# Altium PCB 风火轮（单面）.PcbDoc (part 1 of 4)
Units mil, origin at the board's own origin, x right, y up, seen from the top; angles counter-clockwise.
Board outline 3937.01 x 3937.01 mil, 2 copper layers (Top Layer, Bottom Layer); 108 components, 81 nets, 448 pads, 132 vias.
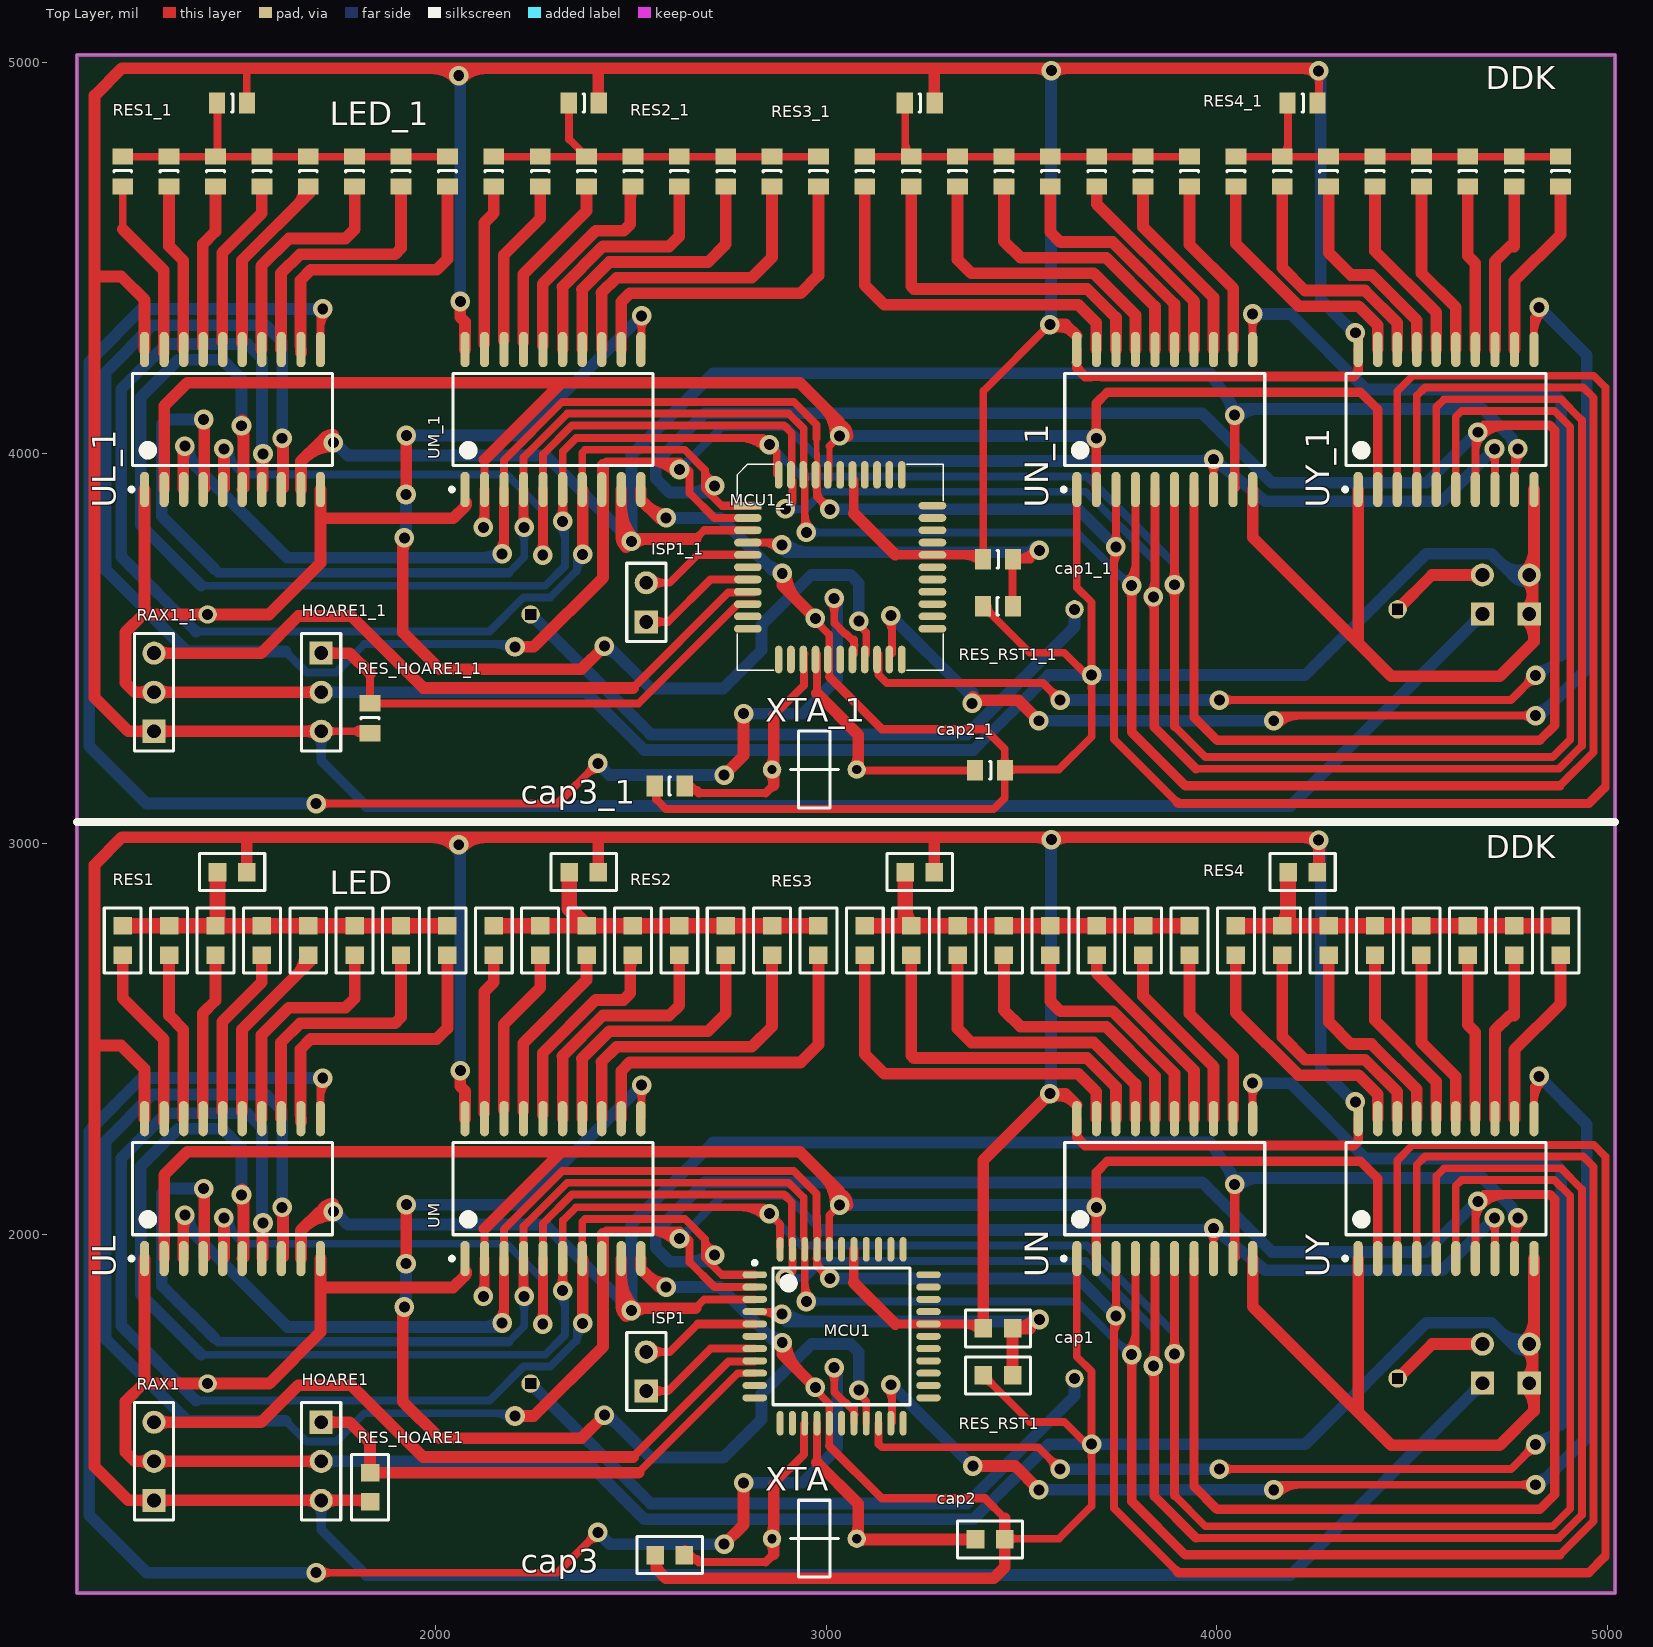
[diagram p0: Top Layer view]
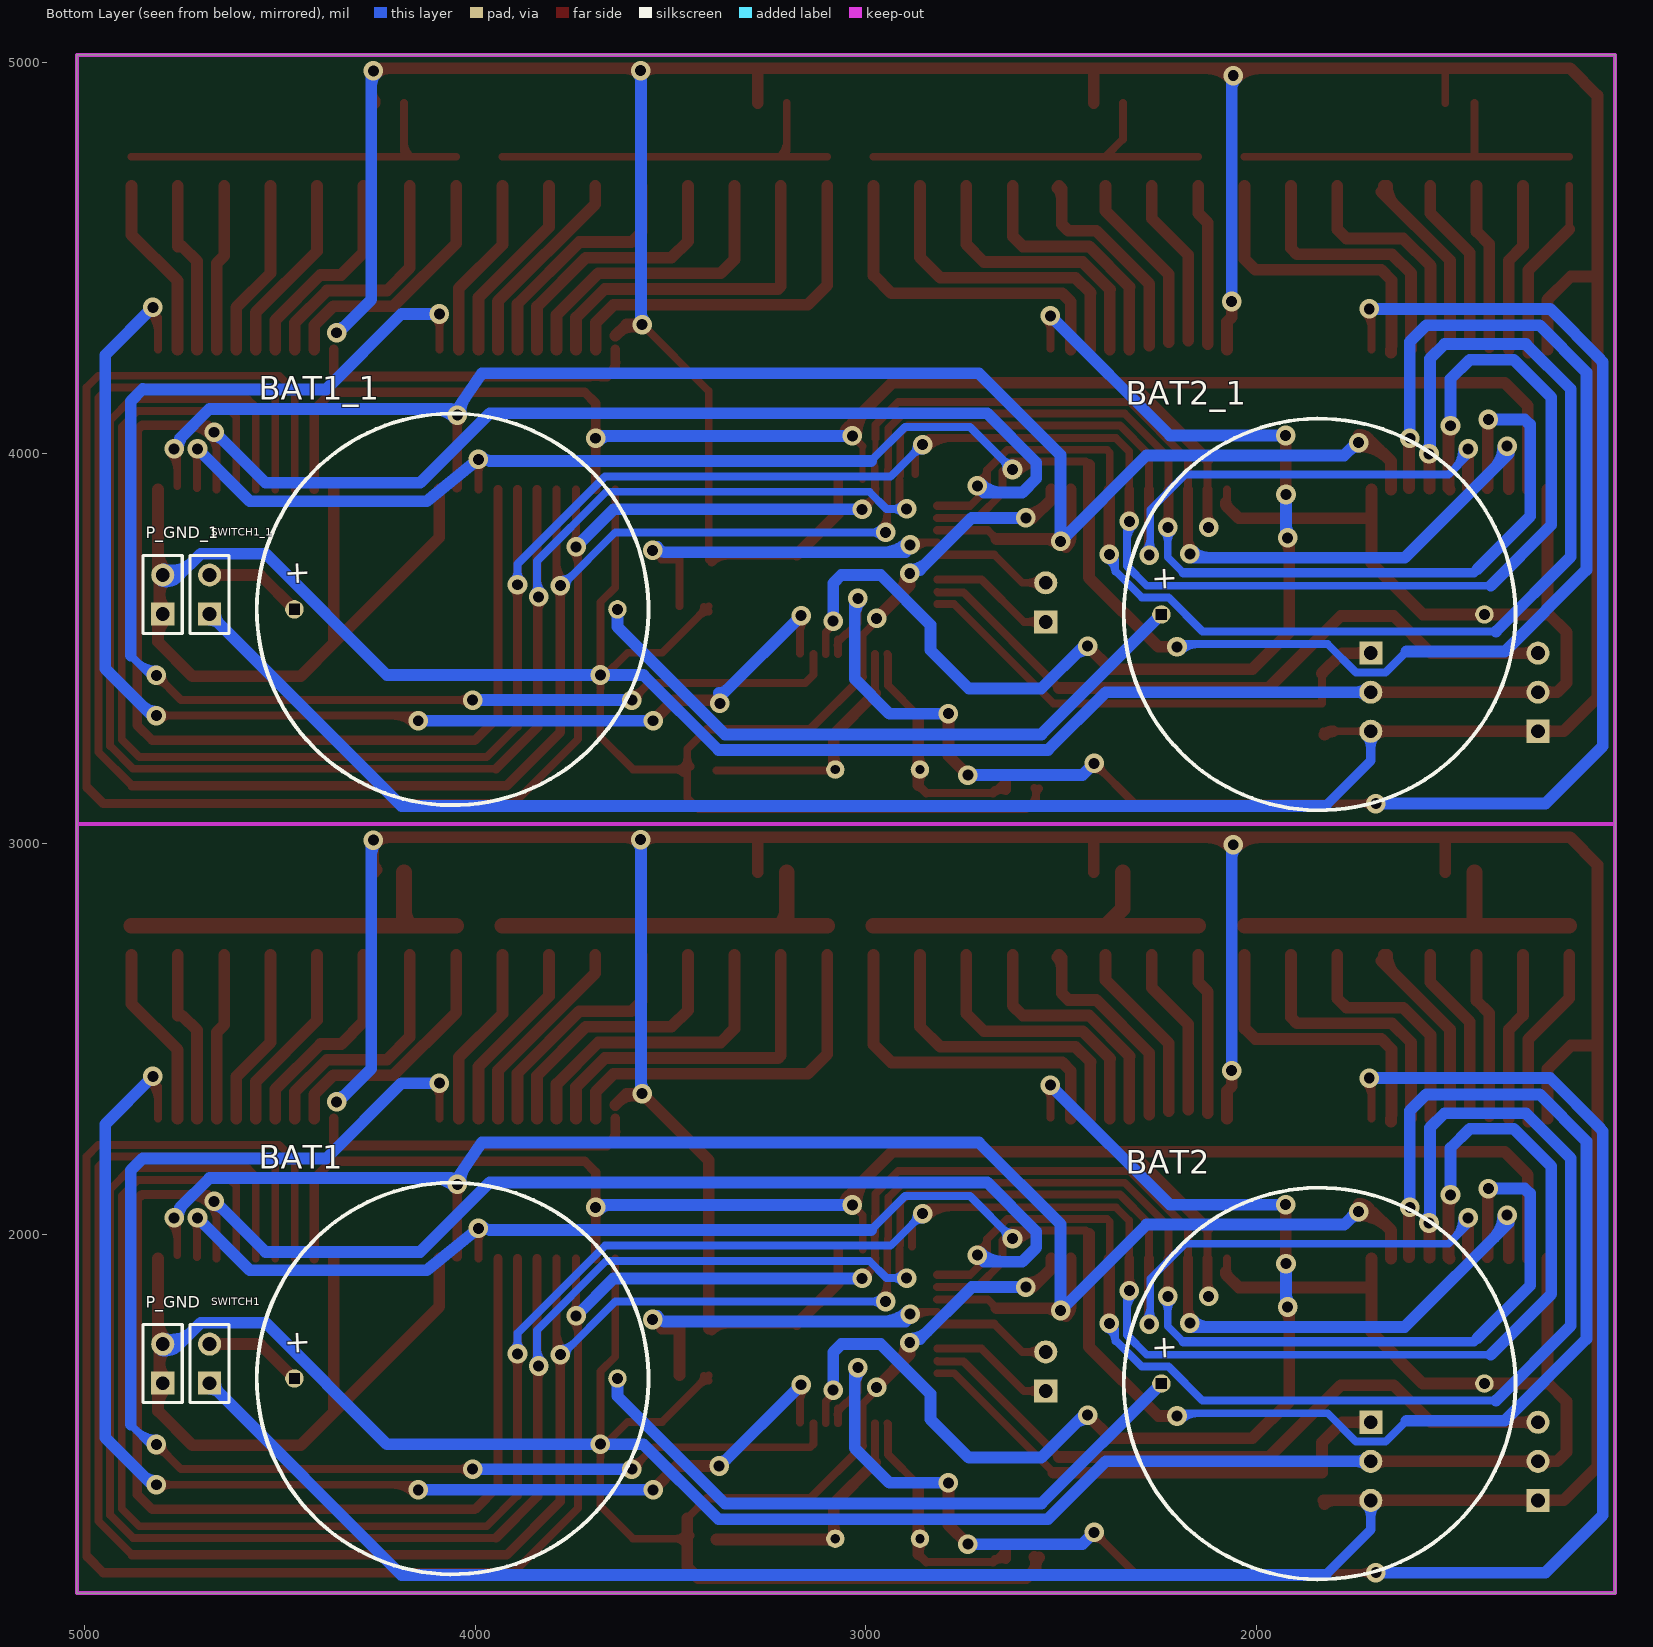
[diagram p1: Bottom Layer view, seen from below]

## Layer stack, top to bottom
Top Layer: signal copper 1.4
Dielectric: dielectric 12.6, FR-4, Dk 4.8
Bottom Layer: signal copper 1.4

## Board outline
1082.68,1082.68 1082.68,5019.69 5019.69,5019.69 5019.69,1082.68

## Design rules (kind name [scope] priority, off if disabled: settings)
Clearance [All] p1: gap=10
PolygonConnect [All] p1: connectstyle=Relief reliefconductorwidth=10 reliefentries=4 polygonreliefangle="90 Angle"
RoutingLayers [All] p1: top layer_v5=TRUE bottom layer_v5=FALSE
RoutingVias [All] p1: holewidth=28 width=50 viastyle="Through Hole" minholewidth=28 minwidth=50 maxholewidth=28 maxwidth=50
SilkscreenOverComponentPads [All] p1: minsilkscreentomaskgap=10
SolderMaskExpansion [All] p1: expansion=4
Width [All] p1: maxlimit=100 minlimit=10 preferedwidth=40
26 further rules are at their usual default settings.

## Classes and differential pairs
component class 风火轮（单面）: BAT1 BAT2 cap1 cap2 cap3 HOARE1 ISP1 led

## Components (designator, comment, footprint, x,y, rotation, side; value= is the part's Value field where it differs from the comment)
BAT1 "battery" 纽扣电池 4463,1632 r180 bottom locked
BAT1_1 "battery" 纽扣电池 4463,3600.5 r180 bottom locked (schematic designator BAT1)
BAT2 "battery" 纽扣电池 2244,1619 r180 bottom locked
BAT2_1 "battery" 纽扣电池 2244,3587.5 r180 bottom locked (schematic designator BAT2)
cap1 "cap0805" 0805（1） 3440,1760 r180 top
cap1_1 "cap0805" "Chip2PinSM127P600-8N 0805_c" 3440,3728.5 r180 top (schematic designator cap1)
cap2 "cap0805" 0805（1） 3420,1220 r180 top
cap2_1 "cap0805" "Chip2PinSM127P600-8N 0805_c" 3420,3188.5 r180 top (schematic designator cap2)
cap3 "cap0805" 0805（1） 2600,1180 r0 top
cap3_1 "cap0805" "Chip2PinSM127P600-8N 0805_c" 2600,3148.5 r0 top (schematic designator cap3)
HOARE1 "Hoare" HDR1X3 1708,1520 r270 top locked
HOARE1_1 "Hoare" HDR1X3 1708,3488.5 r270 top locked (schematic designator HOARE1)
ISP1 "isp" HDR1X2 2540,1600 r90 top locked
ISP1_1 "isp" HDR1X2 2540,3568.5 r90 top locked (schematic designator ISP1)
LED "LED" 0805（1） 1200,2753.03 r270 top (schematic designator LED1)
LED2 "LED" 0805（1） 1318.71,2753.03 r270 top
LED2 "LED" "Chip2PinSM127P600-8N 0805_c" 1318.71,4721.54 r270 top
LED3 "LED" 0805（1） 1437.42,2753.03 r270 top
LED3 "LED" "Chip2PinSM127P600-8N 0805_c" 1437.42,4721.54 r270 top
LED4 "LED" 0805（1） 1556.13,2753.03 r270 top
LED4 "LED" "Chip2PinSM127P600-8N 0805_c" 1556.13,4721.54 r270 top
LED5 "LED" 0805（1） 1674.84,2753.03 r270 top
LED5 "LED" "Chip2PinSM127P600-8N 0805_c" 1674.84,4721.54 r270 top
LED6 "LED" 0805（1） 1793.55,2753.03 r270 top
LED6 "LED" "Chip2PinSM127P600-8N 0805_c" 1793.55,4721.54 r270 top
LED7 "LED" 0805（1） 1912.26,2753.03 r270 top
LED7 "LED" "Chip2PinSM127P600-8N 0805_c" 1912.26,4721.54 r270 top
LED8 "LED" 0805（1） 2030.97,2753.03 r270 top
LED8 "LED" "Chip2PinSM127P600-8N 0805_c" 2030.97,4721.54 r270 top
LED9 "LED" 0805（1） 2149.68,2753.03 r270 top
LED9 "LED" "Chip2PinSM127P600-8N 0805_c" 2149.68,4721.54 r270 top
LED10 "LED" 0805（1） 2268.39,2753.03 r270 top
LED10 "LED" "Chip2PinSM127P600-8N 0805_c" 2268.39,4721.54 r270 top
LED11 "LED" 0805（1） 2387.09,2753.03 r270 top
LED11 "LED" "Chip2PinSM127P600-8N 0805_c" 2387.09,4721.54 r270 top
LED12 "LED" 0805（1） 2505.81,2753.03 r270 top
LED12 "LED" "Chip2PinSM127P600-8N 0805_c" 2505.81,4721.54 r270 top
LED13 "LED" 0805（1） 2624.52,2753.03 r270 top
LED13 "LED" "Chip2PinSM127P600-8N 0805_c" 2624.52,4721.54 r270 top
LED14 "LED" 0805（1） 2743.22,2753.03 r270 top
LED14 "LED" "Chip2PinSM127P600-8N 0805_c" 2743.22,4721.54 r270 top
LED15 "LED" 0805（1） 2861.93,2753.03 r270 top
LED15 "LED" "Chip2PinSM127P600-8N 0805_c" 2861.93,4721.54 r270 top
LED16 "LED" 0805（1） 2980.64,2753.03 r270 top
LED16 "LED" "Chip2PinSM127P600-8N 0805_c" 2980.64,4721.54 r270 top
LED17 "LED" 0805（1） 3099.35,2753.03 r270 top
LED17 "LED" "Chip2PinSM127P600-8N 0805_c" 3099.35,4721.54 r270 top
LED18 "LED" 0805（1） 3218.06,2753.03 r270 top
LED18 "LED" "Chip2PinSM127P600-8N 0805_c" 3218.06,4721.54 r270 top
LED19 "LED" 0805（1） 3336.77,2753.03 r270 top
LED19 "LED" "Chip2PinSM127P600-8N 0805_c" 3336.77,4721.54 r270 top
LED20 "LED" 0805（1） 3455.48,2753.03 r270 top
LED20 "LED" "Chip2PinSM127P600-8N 0805_c" 3455.48,4721.54 r270 top
LED21 "LED" 0805（1） 3574.19,2753.03 r270 top
LED21 "LED" "Chip2PinSM127P600-8N 0805_c" 3574.19,4721.54 r270 top
LED22 "LED" 0805（1） 3692.9,2753.03 r270 top
LED22 "LED" "Chip2PinSM127P600-8N 0805_c" 3692.9,4721.54 r270 top
LED23 "LED" 0805（1） 3811.61,2753.03 r270 top
LED23 "LED" "Chip2PinSM127P600-8N 0805_c" 3811.61,4721.54 r270 top
LED24 "LED" 0805（1） 3930.32,2753.03 r270 top
LED24 "LED" "Chip2PinSM127P600-8N 0805_c" 3930.32,4721.54 r270 top
LED25 "LED" 0805（1） 4049.03,2753.03 r270 top
LED25 "LED" "Chip2PinSM127P600-8N 0805_c" 4049.03,4721.54 r270 top
LED26 "LED" 0805（1） 4167.74,2753.03 r270 top
LED26 "LED" "Chip2PinSM127P600-8N 0805_c" 4167.74,4721.54 r270 top
LED27 "LED" 0805（1） 4286.45,2753.03 r270 top
LED27 "LED" "Chip2PinSM127P600-8N 0805_c" 4286.45,4721.54 r270 top
LED28 "LED" 0805（1） 4405.16,2753.03 r270 top
LED28 "LED" "Chip2PinSM127P600-8N 0805_c" 4405.16,4721.54 r270 top
LED29 "LED" 0805（1） 4523.87,2753.03 r270 top
LED29 "LED" "Chip2PinSM127P600-8N 0805_c" 4523.87,4721.54 r270 top
LED30 "LED" 0805（1） 4642.58,2753.03 r270 top
LED30 "LED" "Chip2PinSM127P600-8N 0805_c" 4642.58,4721.54 r270 top
LED31 "LED" 0805（1） 4761.29,2753.03 r270 top
LED31 "LED" "Chip2PinSM127P600-8N 0805_c" 4761.29,4721.54 r270 top
LED32 "LED" 0805（1） 4880,2753.03 r270 top
LED32 "LED" "Chip2PinSM127P600-8N 0805_c" 4880,4721.54 r270 top
LED_1 "LED" "Chip2PinSM127P600-8N 0805_c" 1200,4721.54 r270 top (schematic designator LED1)
MCU1 "STC89C52" QFP127P600-8N_LQFP889C52 3040,1740 r0 top
MCU1_1 "STC89C52" QFP44 2800,3865.98 r0 top (schematic designator MCU1)
P_GND "_GND" HDR1X2 4800,1620 r90 bottom
P_GND_1 "_GND" HDR1X2 4800,3588.5 r90 bottom (schematic designator P_GND)
RAX1 "REX" HDR1X3 1280,1320 r90 top locked
RAX1_1 "REX" HDR1X3 1280,3288.5 r90 top locked (schematic designator RAX1)
RES1 "RES" 0805（1） 1480,2928 r180 top
RES1_1 "RES" "Chip2PinSM127P600-8N 0805_c" 1480,4896.5 r180 top (schematic designator RES1)
RES2 "RES" 0805（1） 2380,2928 r180 top
RES2_1 "RES" "Chip2PinSM127P600-8N 0805_c" 2380,4896.5 r180 top (schematic designator RES2)
RES3 "RES" 0805（1） 3240,2928 r180 top
RES3_1 "RES" "Chip2PinSM127P600-8N 0805_c" 3240,4896.5 r180 top (schematic designator RES3)
RES4 "RES" 0805（1） 4220,2928 r180 top
RES4_1 "RES" "Chip2PinSM127P600-8N 0805_c" 4220,4896.5 r180 top (schematic designator RES4)
RES_HOARE1 "RES" 0805（1） 1833,1353.46 r270 top
RES_HOARE1_1 "RES" "Chip2PinSM127P600-8N 0805_c" 1833,3321.97 r270 top (schematic designator RES_HOARE1)
RES_RST1 "RES" 0805（1） 3440,1640 r0 top
RES_RST1_1 "RES" "Chip2PinSM127P600-8N 0805_c" 3440,3608.5 r0 top (schematic designator RES_RST1)
SWITCH1 "vcc" HDR1X2 4680,1620 r90 bottom
SWITCH1_1 "vcc" HDR1X2 4680,3588.5 r90 bottom (schematic designator SWITCH1)
UL "CD74HC573M" SOIC127P1030X265-20N_CD74HC573M_SOIC 1481,2118 r90 top
UL_1 "CD74HC573M" SOIC127P1030X265-20N_CD74HC573M_SOIC 1481,4086.5 r90 top (schematic designator UL)
UM "CD74HC573M" SOIC127P1030X265-20N_CD74HC573M_SOIC 2301,2118 r90 top
UM_1 "CD74HC573M" SOIC127P1030X265-20N_CD74HC573M_SOIC 2301,4086.5 r90 top (schematic designator UM)
UN "CD74HC573M" SOIC127P1030X265-20N_CD74HC573M_SOIC 3867,2118 r90 top
UN_1 "CD74HC573M" SOIC127P1030X265-20N_CD74HC573M_SOIC 3867,4086.5 r90 top (schematic designator UN)
UY "CD74HC573M" SOIC127P1030X265-20N_CD74HC573M_SOIC 4587,2118 r90 top
UY_1 "CD74HC573M" SOIC127P1030X265-20N_CD74HC573M_SOIC 4587,4086.5 r90 top (schematic designator UY)
XTA "XTA" TIMER 2862,1222 r0 top locked (schematic designator *)
XTA_1 "XTA" TIMER 2862,3190.5 r0 top locked (schematic designator *)

## Footprints (in the part's own frame and the unit in brackets; to place one, negate y for a bottom-side part, rotate by r counter-clockwise, add the part's x,y. Pads: shape width x height; smd on the part's side, far side on the other; paste and mask are expansions set on the pad)
0805（1） [mm]
  rect 1.14x1.2 smd: A(-0.95,0) K(0.95,0)
  silkscreen extent -2.12,-1.2 2.12,1.2
"Chip2PinSM127P600-8N 0805_c" [mm]
  rect 1.05x1.35 smd: 1(-0.975,0) 2(0.975,0)
  silkscreen extent -0.05,-0.58 0.05,0.58, body extent -1.04,-0.63 1.04,0.63, height 0.52
HDR1X2 [mm] "Connector; Header; 2 Position"
  rect 1.5x1.5 hole 0.9: 1(0,0)
  round 1.5 hole 0.9: 2(2.54,0)
  silkscreen extent -1.27,-1.27 3.81,1.27
HDR1X3 [mm] "Connector; Header; 3 Position"
  rect 1.5x1.5 hole 0.9: 1(0,0)
  round 1.5 hole 0.9: 2(2.54,0) 3(5.08,0)
  silkscreen extent -1.27,-1.27 6.35,1.27
QFP44 [mm]
  rect 1.8x0.5 smd: 1(0,0)
  oval 1.8x0.5 smd: 2(0,-0.8) 3(0,-1.6) 4(0,-2.4) 5(0,-3.2) 6(0,-4) 7(0,-4.8) 8(0,-5.6) 9(0,-6.4) 10(0,-7.2) 11(0,-8) 23(12,-8) 24(12,-7.2) 25(12,-6.4) 26(12,-5.6) 27(12,-4.8) 28(12,-4) 29(12,-3.2) 30(12,-2.4) 31(12,-1.6) 32(12,-0.8) 33(12,0)
  oval 0.5x1.8 smd: 12(2,-10) 13(2.8,-10) 14(3.6,-10) 15(4.4,-10) 16(5.2,-10) 17(6,-10) 18(6.8,-10) 19(7.6,-10) 20(8.4,-10) 21(9.2,-10) 22(10,-10) 34(10,2) 35(9.2,2) 36(8.4,2) 37(7.6,2) 38(6.8,2) 39(6,2) 40(5.2,2) 41(4.4,2) 42(3.6,2) 43(2.8,2) 44(2,2)
  silkscreen extent -0.7,-10.7 12.7,2.7
QFP127P600-8N_LQFP889C52 [mm]
  oval 1.6x0.45 smd: 1(-5.65,4) 2(-5.65,3.2) 3(-5.65,2.4) 4(-5.65,1.6) 5(-5.65,0.8) 6(-5.65,0) 7(-5.65,-0.8) 8(-5.65,-1.6) 9(-5.65,-2.4) 10(-5.65,-3.2) 11(-5.65,-4) 23(5.65,-4) 24(5.65,-3.2) 25(5.65,-2.4) 26(5.65,-1.6) 27(5.65,-0.8) 28(5.65,0) 29(5.65,0.8) 30(5.65,1.6) 31(5.65,2.4) 32(5.65,3.2) 33(5.65,4)
  oval 0.45x1.6 smd: 12(-4,-5.65) 13(-3.2,-5.65) 14(-2.4,-5.65) 15(-1.6,-5.65) 16(-0.8,-5.65) 17(0,-5.65) 18(0.8,-5.65) 19(1.6,-5.65) 20(2.4,-5.65) 21(3.2,-5.65) 22(4,-5.65) 34(4,5.65) 35(3.2,5.65) 36(2.4,5.65) 37(1.6,5.65) 38(0.8,5.65) 39(0,5.65) 40(-0.8,5.65) 41(-1.6,5.65) 42(-2.4,5.65) 43(-3.2,5.65) 44(-4,5.65)
  silkscreen extent -5.77,-4.45 4.45,4.9, body extent -5,-5 5,5, height 1.6
SOIC127P1030X265-20N_CD74HC573M_SOIC [mm] "SOIC, 20-Leads, Body 13.0x7.6mm (max), Pitch 1.27mm, IPC Medium Density"
  oval 2.3x0.6 smd: 1(-4.55,5.715) 2(-4.55,4.445) 3(-4.55,3.175) 4(-4.55,1.905) 5(-4.55,0.635) 6(-4.55,-0.635) 7(-4.55,-1.905) 8(-4.55,-3.175) 9(-4.55,-4.445) 10(-4.55,-5.715) 11(4.55,-5.715) 12(4.55,-4.445) 13(4.55,-3.175) 14(4.55,-1.905) 15(4.55,-0.635) 16(4.55,0.635) 17(4.55,1.905) 18(4.55,3.175) 19(4.55,4.445) 20(4.55,5.715)
  silkscreen extent -4.67,-6.5 3,6.69, body extent -3.8,-6.5 3.8,6.5, height 2.65
TIMER [mm]
  round 1.2 hole 0.6: 1(0,0) 2(5.5,0)
  silkscreen extent 1.2,-2.5 4.3,2.5
纽扣电池 [mm]
  round 1.2 hole 0.7 square: A(0,0)
  round 1.2 hole 0.7: K(21,0)
  silkscreen extent -2.44,-12.73 23.01,12.73

## Part data
HOARE1 HOARE1_1 RAX1 RAX1_1: library part "Header 3", "Header, 3-Pin"
ISP1 ISP1_1 P_GND P_GND_1 SWITCH1 SWITCH1_1: library part "Header 2", "Header, 2-Pin"
LED LED2 LED2 LED3 LED3 LED4 LED4 LED5 LED5 LED6 LED6 LED7 LED7 LED8 LED8 LED9 LED9 LED10 LED10 LED11 LED11 LED12 LED12 LED13 LED13 LED14 LED14 LED15 LED15 LED16 LED16 LED17 LED17 LED18 LED18 LED19 LED19 LED20 LED20 LED21 LED21 LED22 LED22 LED23 LED23 LED24 LED24 LED25 LED25 LED26 LED26 LED27 LED27 LED28 LED28 LED29 LED29 LED30 LED30 LED31 LED31 LED32 LED32 LED_1: library part led0805
RES1 RES1_1 RES2 RES2_1 RES3 RES3_1 RES4 RES4_1 RES_HOARE1 RES_HOARE1_1 RES_RST1 RES_RST1_1: library part res0805

## Via types
v1: diameter 50, hole 28, Top Layer to Bottom Layer, 132 vias

## Nets (pads, with @x,y where several pads share a name; then routed paths per layer and width w, separated by ;. In a path a pad name is that pad's centre, name@x,y a point inside that pad or via, vN(x,y) a via of type N, cw(c..) or ccw(c..) an arc to the next point about the centre after c; other vN are vias at no path point)
_BAT: BAT1.A SWITCH1.2 | length 473.8
  Top Layer w30: BAT1.A@4463,1632 4551,1720 SWITCH1.2@4680,1720 ; 4644.93,1720 cw(c4644.93,1684.93) SWITCH1.2@4669.73,1709.73 ; 4644.93,1720 ccw(c4644.93,1755.07) SWITCH1.2@4669.73,1730.27 ; 4644.93,1720 cw(c4644.93,1684.93) SWITCH1.2@4669.73,1709.73 ; 4644.93,1720 ccw(c4644.93,1755.07) SWITCH1.2@4669.73,1730.27 ; 4644.93,1720 cw(c4644.93,1684.93) SWITCH1.2@4669.73,1709.73 ; 4644.93,1720 ccw(c4644.93,1755.07) SWITCH1.2@4669.73,1730.27 ; 4644.93,1720 cw(c4644.93,1684.93) SWITCH1.2@4669.73,1709.73 ; 4644.93,1720 ccw(c4644.93,1755.07) SWITCH1.2@4669.73,1730.27
CON_1: MCU1.40 UL.2 UM.2 UN.2 UY.2 | length 5565.4
  Top Layer w20: UM.2@2126,1938.87 2126,2015 ; MCU1.40@3008.5,1962.44 3008.5,2049.5 v1(3035,2076)
  Top Layer w24: UN.2@3692,1938.87 v1(3692,2070) 3692,2160 3720,2188 4368,2188 4412,2144 UY.2@4412,1938.87 ; v1@3682.81,2060.81 cw(c3660.62,2038.62) 3692,2038.62 ; v1@3682.81,2060.81 cw(c3660.62,2038.62) 3692,2038.62 ; v1@3682.81,2060.81 cw(c3660.62,2038.62) 3692,2038.62 ; v1@3682.81,2060.81 cw(c3660.62,2038.62) 3692,2038.62 ; v1@3682.81,2079.19 ccw(c3660.62,2101.38) 3692,2101.38 ; v1@3682.81,2079.19 ccw(c3660.62,2101.38) 3692,2101.38 ; v1@3682.81,2079.19 ccw(c3660.62,2101.38) 3692,2101.38 ; v1@3682.81,2079.19 ccw(c3660.62,2101.38) 3692,2101.38 ; 3692,2038.62 cw(c3723.38,2038.62) v1@3701.19,2060.81 ; 3692,2038.62 cw(c3723.38,2038.62) v1@3701.19,2060.81 ; 3692,2038.62 cw(c3723.38,2038.62) v1@3701.19,2060.81 ; 3692,2038.62 cw(c3723.38,2038.62) v1@3701.19,2060.81 ; 3692,2101.38 ccw(c3723.38,2101.38) v1@3701.19,2079.19 ; 3692,2101.38 ccw(c3723.38,2101.38) v1@3701.19,2079.19 ; 3692,2101.38 ccw(c3723.38,2101.38) v1@3701.19,2079.19 ; 3692,2101.38 ccw(c3723.38,2101.38) v1@3701.19,2079.19
  Top Layer w25: v1@2126,1845 UM.2@2126,1938.87 ; v1@2114.16,1850.84 ccw(c2085.58,1879.42) 2126,1879.42 ; v1@2114.16,1850.84 ccw(c2085.58,1879.42) 2126,1879.42 ; v1@2114.16,1850.84 ccw(c2085.58,1879.42) 2126,1879.42 ; v1@2114.16,1850.84 ccw(c2085.58,1879.42) 2126,1879.42
  Top Layer w30: UL.2@1306,1938.87 1306,2153 1365,2212 2323,2212 ; 2126,2015 2323,2212 ; 2307,2212 2323,2212 ; v1(3035,2076) 3035,2109.71 2932.71,2212 2323,2212 ; 2994.1,2150.61 cw(c2919.49,2076) v1@3025,2076 ; 2994.1,2150.61 cw(c2919.49,2076) v1@3025,2076 ; 2994.1,2150.61 cw(c2919.49,2076) v1@3025,2076 ; 2994.1,2150.61 cw(c2919.49,2076) v1@3025,2076 ; 3045.31,2099.4 cw(c3021.91,2076) v1@3055,2076 ; 3045.31,2099.4 cw(c3021.91,2076) v1@3055,2076 ; 3045.31,2099.4 cw(c3021.91,2076) v1@3055,2076 ; 3045.31,2099.4 cw(c3021.91,2076) v1@3055,2076
  Bottom Layer w20: v1@3686,2076 v1(3692,2070)
  Bottom Layer w30: v1(3035,2076) v1@3686,2076 ; 3653.37,2076 cw(c3653.37,2031.37) v1@3684.93,2062.93 ; 3653.37,2076 cw(c3653.37,2031.37) v1@3684.93,2062.93 ; 3653.37,2076 cw(c3653.37,2031.37) v1@3684.93,2062.93 ; 3653.37,2076 cw(c3653.37,2031.37) v1@3684.93,2062.93
  other v1: 2123,1842
CON_2: MCU1.41 UL.3 UM.3 UN.3 UY.3 | length 8476
  Top Layer w20: UM.3@2176,1938.87 2176,2013.85 2325.15,2163 2917.28,2163 2975.51,2104.77 2975.51,2069.19 ; MCU1.41@2977.01,1962.44 2977.01,1920.99 v1(3010,1888) ; MCU1.41@2977.51,1961.44 2977.51,1997.02 ; UN.3@3742,1938.87 v1(3742,1792) 3737,1787 3737,1300 3897,1140 ; UY.3@4462,1938.87 4462,2190 4502,2230 4965,2230 4994.69,2200.31 4994.69,1175.69 ; MCU1.41@2975.87,1939.8 ccw(c3018.52,1939.8) 2988.36,1909.64 ; MCU1.41@2975.87,1939.8 ccw(c3018.52,1939.8) 2988.36,1909.64 ; MCU1.41@2975.87,1939.8 ccw(c3018.52,1939.8) 2988.36,1909.64 ; MCU1.41@2975.87,1939.8 ccw(c3018.52,1939.8) 2988.36,1909.64 ; 2984.39,1913.61 cw(c2958.79,1888) v1@2995,1888 ; 2984.39,1913.61 ccw(c3010,1939.21) v1@3010,1903 ; 2984.39,1913.61 cw(c2958.79,1888) v1@2995,1888 ; 2984.39,1913.61 ccw(c3010,1939.21) v1@3010,1903 ; 2984.39,1913.61 cw(c2958.79,1888) v1@2995,1888 ; 2984.39,1913.61 ccw(c3010,1939.21) v1@3010,1903 ; 2984.39,1913.61 cw(c2958.79,1888) v1@2995,1888 ; 2984.39,1913.61 ccw(c3010,1939.21) v1@3010,1903 ; v1@3731.39,1802.61 ccw(c3705.79,1828.21) 3742,1828.21 ; v1@3731.39,1802.61 ccw(c3705.79,1828.21) 3742,1828.21 ; v1@3731.39,1802.61 ccw(c3705.79,1828.21) 3742,1828.21 ; v1@3731.39,1802.61 ccw(c3705.79,1828.21) 3742,1828.21 ; 3737,1743.72 cw(c3790.28,1743.72) v1@3752.61,1781.39 ; 3737,1743.72 cw(c3790.28,1743.72) v1@3752.61,1781.39 ; 3737,1743.72 cw(c3790.28,1743.72) v1@3752.61,1781.39 ; 3737,1743.72 cw(c3790.28,1743.72) v1@3752.61,1781.39 ; 3742,1828.21 ccw(c3778.21,1828.21) v1@3752.61,1802.61 ; 3742,1828.21 ccw(c3778.21,1828.21) v1@3752.61,1802.61 ; 3742,1828.21 ccw(c3778.21,1828.21) v1@3752.61,1802.61 ; 3742,1828.21 ccw(c3778.21,1828.21) v1@3752.61,1802.61
  Top Layer w21: 2975.51,2069.19 2977.51,1997.02
  Top Layer w24: 3897,1140 3902,1135 4952,1135 4992.69,1175.69
  Top Layer w25: v1@2176,1774 UM.3@2176,1938.87 ; v1@2162.16,1782.84 ccw(c2128.75,1816.25) 2176,1816.25 ; v1@2162.16,1782.84 ccw(c2128.75,1816.25) 2176,1816.25 ; v1@2162.16,1782.84 ccw(c2128.75,1816.25) 2176,1816.25 ; v1@2162.16,1782.84 ccw(c2128.75,1816.25) 2176,1816.25
  Top Layer w30: UL.3@1355,1939.87 1355,2030 1359,2034 v1(1359,2050) ; 1355,2016.2 cw(c1392.8,2016.2) v1@1366.07,2042.93 ; 1355,2016.2 cw(c1392.8,2016.2) v1@1366.07,2042.93 ; 1355,2016.2 cw(c1392.8,2016.2) v1@1366.07,2042.93 ; 1355,2016.2 cw(c1392.8,2016.2) v1@1366.07,2042.93
  Bottom Layer w20: v1@2161,1764 v1(2171,1774)
  Bottom Layer w30: v1(1359,2050) 1359,2034 1355,2030 1621,1764 v1@2161,1764 ; v1(3010,1888) 3646,1888 v1(3742,1792) ; v1@1369,2050 ccw(c1451.08,2050) 1393.04,1991.96 ; v1@1369,2050 ccw(c1451.08,2050) 1393.04,1991.96 ; v1@1369,2050 ccw(c1451.08,2050) 1393.04,1991.96 ; v1@1369,2050 ccw(c1451.08,2050) 1393.04,1991.96 ; 2122.72,1764 ccw(c2122.72,1822.28) v1@2163.93,1781.07 ; 2122.72,1764 ccw(c2122.72,1822.28) v1@2163.93,1781.07 ; 2122.72,1764 ccw(c2122.72,1822.28) v1@2163.93,1781.07 ; 2122.72,1764 ccw(c2122.72,1822.28) v1@2163.93,1781.07
CON_3: MCU1.42 UL.4 UM.4 UN.4 UY.4 | length 8864.8
  Top Layer w20: UM.4@2226,1938.87 2226,2021.43 2337.57,2133 2904.85,2133 2942.87,2094.98 2942.87,1997.55 MCU1.42@2947,1966 ; MCU1.42@2945.51,1962.44 2945.51,1833.49 v1(2950,1829) ; v1(3782,1693) 3792,1693 UN.4@3792,1938.87 ; UY.4@4512,1938.87 4512,2179 4533,2200 4938,2200 4964.69,2173.31 4964.69,1267.11 4878.57,1181 ; v1@2939.39,1839.61 ccw(c2924.62,1854.38) 2945.51,1854.38 ; v1@2939.39,1839.61 ccw(c2924.62,1854.38) 2945.51,1854.38 ; v1@2939.39,1839.61 ccw(c2924.62,1854.38) 2945.51,1854.38 ; v1@2939.39,1839.61 ccw(c2924.62,1854.38) 2945.51,1854.38 ; 2945.51,1876.05 ccw(c2997.05,1876.05) v1@2960.61,1839.61 ; 2945.51,1876.05 ccw(c2997.05,1876.05) v1@2960.61,1839.61 ; 2945.51,1876.05 ccw(c2997.05,1876.05) v1@2960.61,1839.61 ; 2945.51,1876.05 ccw(c2997.05,1876.05) v1@2960.61,1839.61 ; v1@3771.39,1703.61 ccw(c3721.64,1753.36) 3792,1753.36 ; v1@3771.39,1703.61 ccw(c3721.64,1753.36) 3792,1753.36 ; v1@3771.39,1703.61 ccw(c3721.64,1753.36) 3792,1753.36 ; v1@3771.39,1703.61 ccw(c3721.64,1753.36) 3792,1753.36
  Top Layer w24: v1@3792,1693 3783,1684 3783,1317.17 3919.17,1181 4878.57,1181 ; v1@3772.81,1683.81 cw(c3748.2,1659.2) 3783,1659.2 ; v1@3772.81,1683.81 cw(c3748.2,1659.2) 3783,1659.2 ; v1@3772.81,1683.81 cw(c3748.2,1659.2) 3783,1659.2 ; v1@3772.81,1683.81 cw(c3748.2,1659.2) 3783,1659.2 ; 3783,1664.03 cw(c3810.97,1664.03) v1@3791.19,1683.81 ; 3783,1664.03 cw(c3810.97,1664.03) v1@3791.19,1683.81 ; 3783,1664.03 cw(c3810.97,1664.03) v1@3791.19,1683.81 ; 3783,1664.03 cw(c3810.97,1664.03) v1@3791.19,1683.81
  Top Layer w25: v1@2226,1843.57 UM.4@2226,1938.87 ; v1@2218.73,1850.84 ccw(c2201.19,1868.38) 2226,1868.38 ; v1@2218.73,1850.84 ccw(c2201.19,1868.38) 2226,1868.38 ; v1@2218.73,1850.84 ccw(c2201.19,1868.38) 2226,1868.38 ; v1@2218.73,1850.84 ccw(c2201.19,1868.38) 2226,1868.38 ; 2226,1875.97 ccw(c2261.54,1875.97) v1@2236.41,1850.84 ; 2226,1875.97 ccw(c2261.54,1875.97) v1@2236.41,1850.84 ; 2226,1875.97 ccw(c2261.54,1875.97) v1@2236.41,1850.84 ; 2226,1875.97 ccw(c2261.54,1875.97) v1@2236.41,1850.84
  Top Layer w30: UL.4@1410,1942.87 1409,1943.87 1409,2117 v1@1410,2118 ; v1@1399.93,2110.93 cw(c1378.03,2089.03) 1409,2089.03 ; v1@1399.93,2110.93 cw(c1378.03,2089.03) 1409,2089.03 ; v1@1399.93,2110.93 cw(c1378.03,2089.03) 1409,2089.03 ; v1@1399.93,2110.93 cw(c1378.03,2089.03) 1409,2089.03
  Bottom Layer w20: 1435,1735 1444,1726 ; 2188,1726 2227.57,1765.57 v1(2227.57,1842) ; v1(2950,1829) 3641.36,1829 3777.36,1693 v1@3792,1693 ; v1@2216.96,1831.39 cw(c2191.36,1805.79) 2227.57,1805.79 ; v1@2216.96,1831.39 cw(c2191.36,1805.79) 2227.57,1805.79 ; v1@2216.96,1831.39 cw(c2191.36,1805.79) 2227.57,1805.79 ; v1@2216.96,1831.39 cw(c2191.36,1805.79) 2227.57,1805.79 ; 2227.57,1805.79 cw(c2263.78,1805.79) v1@2238.18,1831.39 ; 2227.57,1805.79 cw(c2263.78,1805.79) v1@2238.18,1831.39 ; 2227.57,1805.79 cw(c2263.78,1805.79) v1@2238.18,1831.39 ; 2227.57,1805.79 cw(c2263.78,1805.79) v1@2238.18,1831.39 ; v1@2960.61,1818.39 cw(c2986.21,1792.79) 2986.21,1829 ; v1@2960.61,1818.39 cw(c2986.21,1792.79) 2986.21,1829 ; v1@2960.61,1818.39 cw(c2986.21,1792.79) 2986.21,1829 ; v1@2960.61,1818.39 cw(c2986.21,1792.79) 2986.21,1829 ; v1@2960.61,1839.61 ccw(c2986.21,1865.21) 2986.21,1829 ; v1@2960.61,1839.61 ccw(c2986.21,1865.21) 2986.21,1829 ; v1@2960.61,1839.61 ccw(c2986.21,1865.21) 2986.21,1829 ; v1@2960.61,1839.61 ccw(c2986.21,1865.21) 2986.21,1829 ; 3748.47,1721.89 ccw(c3782,1755.41) v1@3782,1708 ; 3748.47,1721.89 ccw(c3782,1755.41) v1@3782,1708 ; 3748.47,1721.89 ccw(c3782,1755.41) v1@3782,1708 ; 3748.47,1721.89 ccw(c3782,1755.41) v1@3782,1708 ; 3759.67,1710.69 cw(c3741.99,1693) v1@3767,1693 ; 3759.67,1710.69 cw(c3741.99,1693) v1@3767,1693 ; 3759.67,1710.69 cw(c3741.99,1693) v1@3767,1693 ; 3759.67,1710.69 cw(c3741.99,1693) v1@3767,1693
  Bottom Layer w24: 1444,1726 2188,1726
  Bottom Layer w30: 1300,2106 1300,1870 1435,1735 ; 1302,2106 1314,2118 v1(1407,2118)
CON_4: MCU1.43 UL.5 UM.5 UN.5 UY.5 | length 8031.4
  Top Layer w20: UM.5@2276,1938.87 2276,2029 2350,2103 2892.43,2103 2912.52,2082.91 MCU1.43@2912.52,1974 ; v1(2896,1889) 2914.02,1907.02 MCU1.43@2914.02,1962.44 ; 3947,1224 4876,1224 4934.69,1282.69 4934.69,2116.31 4881,2170 4582,2170 4562,2150 UY.5@4562,1938.87
  Top Layer w24: v1@3840,1664 3840,1331 3947,1224 ; v1@3842,1678.53 UN.5@3842,1938.87 ; v1@3828.81,1654.81 cw(c3801.79,1627.79) 3840,1627.79 ; v1@3828.81,1654.81 cw(c3801.79,1627.79) 3840,1627.79 ; v1@3828.81,1654.81 cw(c3801.79,1627.79) 3840,1627.79 ; v1@3828.81,1654.81 cw(c3801.79,1627.79) 3840,1627.79 ; v1@3828.81,1673.19 ccw(c3796.96,1705.04) 3842,1705.04 ; v1@3828.81,1673.19 ccw(c3796.96,1705.04) 3842,1705.04 ; v1@3828.81,1673.19 ccw(c3796.96,1705.04) 3842,1705.04 ; v1@3828.81,1673.19 ccw(c3796.96,1705.04) 3842,1705.04 ; 3840,1637.44 cw(c3864.56,1637.44) v1@3847.19,1654.81 ; 3840,1637.44 cw(c3864.56,1637.44) v1@3847.19,1654.81 ; 3840,1637.44 cw(c3864.56,1637.44) v1@3847.19,1654.81 ; 3840,1637.44 cw(c3864.56,1637.44) v1@3847.19,1654.81
  Top Layer w25: v1@2276,1771 UM.5@2276,1938.87 ; v1@2266.16,1779.84 ccw(c2242.41,1803.59) 2276,1803.59 ; v1@2266.16,1779.84 ccw(c2242.41,1803.59) 2276,1803.59 ; v1@2266.16,1779.84 ccw(c2242.41,1803.59) 2276,1803.59 ; v1@2266.16,1779.84 ccw(c2242.41,1803.59) 2276,1803.59 ; 2276,1798.76 ccw(c2302.76,1798.76) v1@2283.84,1779.84 ; 2276,1798.76 ccw(c2302.76,1798.76) v1@2283.84,1779.84 ; 2276,1798.76 ccw(c2302.76,1798.76) v1@2283.84,1779.84 ; 2276,1798.76 ccw(c2302.76,1798.76) v1@2283.84,1779.84
  Top Layer w30: UL.5@1459,1941.87 v1@1459,2030
  Bottom Layer w20: v1(1459,2043) 1459,2033.14 1455.86,2030 1508.86,1977 2182.57,1977 2272.57,1887 2272.57,1773.43 v1(2275,1771) ; v1(2896,1889) 2947.36,1889 2991.36,1933 3664.64,1933 3842,1755.64 3842,1660 v1(3838,1664) v1@3838,1686 ; v1@1474,2043 ccw(c1549.19,2043) 1496.02,1989.84 ; v1@1474,2043 ccw(c1549.19,2043) 1496.02,1989.84 ; v1@1474,2043 ccw(c1549.19,2043) 1496.02,1989.84 ; v1@1474,2043 ccw(c1549.19,2043) 1496.02,1989.84 ; v1@2264.39,1781.61 ccw(c2244.65,1801.35) 2272.57,1801.35 ; v1@2264.39,1781.61 ccw(c2244.65,1801.35) 2272.57,1801.35 ; v1@2264.39,1781.61 ccw(c2244.65,1801.35) 2272.57,1801.35 ; v1@2264.39,1781.61 ccw(c2244.65,1801.35) 2272.57,1801.35 ; 2272.57,1813.08 ccw(c2317.08,1813.08) v1@2285.61,1781.61 ; 2272.57,1813.08 ccw(c2317.08,1813.08) v1@2285.61,1781.61 ; 2272.57,1813.08 ccw(c2317.08,1813.08) v1@2285.61,1781.61 ; 2272.57,1813.08 ccw(c2317.08,1813.08) v1@2285.61,1781.61 ; v1@2906.61,1878.39 cw(c2932.21,1852.79) 2932.21,1889 ; v1@2906.61,1878.39 cw(c2932.21,1852.79) 2932.21,1889 ; v1@2906.61,1878.39 cw(c2932.21,1852.79) 2932.21,1889 ; v1@2906.61,1878.39 cw(c2932.21,1852.79) 2932.21,1889 ; v1@2906.61,1899.61 ccw(c2932.21,1925.21) 2932.21,1889 ; v1@2906.61,1899.61 ccw(c2932.21,1925.21) 2932.21,1889 ; v1@2906.61,1899.61 ccw(c2932.21,1925.21) 2932.21,1889 ; v1@2906.61,1899.61 ccw(c2932.21,1925.21) 2932.21,1889 ; v1@3827.39,1674.61 ccw(c3792.13,1709.87) 3842,1709.87 ; v1@3827.39,1674.61 ccw(c3792.13,1709.87) 3842,1709.87 ; v1@3827.39,1674.61 ccw(c3792.13,1709.87) 3842,1709.87 ; v1@3827.39,1674.61 ccw(c3792.13,1709.87) 3842,1709.87 ; 3842,1690.56 ccw(c3864.56,1690.56) v1@3848.61,1674.61 ; 3842,1690.56 ccw(c3864.56,1690.56) v1@3848.61,1674.61 ; 3842,1690.56 ccw(c3864.56,1690.56) v1@3848.61,1674.61 ; 3842,1690.56 ccw(c3864.56,1690.56) v1@3848.61,1674.61
CON_5: MCU1.44 UL.6 UM.6 UN.6 UY.6 | length 9041.8
  Top Layer w20: UM.6@2326,1938.87 2326,2036 2360.48,2070.48 2838.52,2070.48 v1(2855.13,2053.87) 2882.52,2026.48 MCU1.44@2882.52,1970 ; 3892,1333 3971,1254 4859.69,1254 4904.69,1299 4904.69,2099.31 4864,2140 4627,2140 4612,2125 UY.6@4612,1938.87 ; 2778.82,2070.48 cw(c2778.82,1977.57) v1@2844.52,2043.27 ; 2778.82,2070.48 cw(c2778.82,1977.57) v1@2844.52,2043.27 ; 2778.82,2070.48 cw(c2778.82,1977.57) v1@2844.52,2043.27 ; 2778.82,2070.48 cw(c2778.82,1977.57) v1@2844.52,2043.27 ; 2827.11,2070.48 cw(c2827.11,2025.85) v1@2858.66,2057.41 ; 2827.11,2070.48 cw(c2827.11,2025.85) v1@2858.66,2057.41 ; 2827.11,2070.48 cw(c2827.11,2025.85) v1@2858.66,2057.41 ; 2827.11,2070.48 cw(c2827.11,2025.85) v1@2858.66,2057.41
  Top Layer w24: 3892,1333 UN.6@3892,1938.87 ; v1@3882.81,1685.81 cw(c3860.62,1663.62) 3892,1663.62 ; v1@3882.81,1685.81 cw(c3860.62,1663.62) 3892,1663.62 ; v1@3882.81,1685.81 cw(c3860.62,1663.62) 3892,1663.62 ; v1@3882.81,1685.81 cw(c3860.62,1663.62) 3892,1663.62 ; v1@3882.81,1704.19 ccw(c3860.62,1726.38) 3892,1726.38 ; v1@3882.81,1704.19 ccw(c3860.62,1726.38) 3892,1726.38 ; v1@3882.81,1704.19 ccw(c3860.62,1726.38) 3892,1726.38 ; v1@3882.81,1704.19 ccw(c3860.62,1726.38) 3892,1726.38 ; 3892,1663.62 cw(c3923.38,1663.62) v1@3901.19,1685.81 ; 3892,1663.62 cw(c3923.38,1663.62) v1@3901.19,1685.81 ; 3892,1663.62 cw(c3923.38,1663.62) v1@3901.19,1685.81 ; 3892,1663.62 cw(c3923.38,1663.62) v1@3901.19,1685.81 ; 3892,1726.38 ccw(c3923.38,1726.38) v1@3901.19,1704.19 ; 3892,1726.38 ccw(c3923.38,1726.38) v1@3901.19,1704.19 ; 3892,1726.38 ccw(c3923.38,1726.38) v1@3901.19,1704.19 ; 3892,1726.38 ccw(c3923.38,1726.38) v1@3901.19,1704.19
  Top Layer w25: v1@2326,1848.14 UM.6@2326,1938.87 ; v1@2317.16,1865.84 ccw(c2295.82,1887.18) 2326,1887.18 ; v1@2317.16,1865.84 ccw(c2295.82,1887.18) 2326,1887.18 ; v1@2317.16,1865.84 ccw(c2295.82,1887.18) 2326,1887.18 ; v1@2317.16,1865.84 ccw(c2295.82,1887.18) 2326,1887.18 ; 2326,1887.18 ccw(c2356.18,1887.18) v1@2334.84,1865.84 ; 2326,1887.18 ccw(c2356.18,1887.18) v1@2334.84,1865.84 ; 2326,1887.18 ccw(c2356.18,1887.18) v1@2334.84,1865.84 ; 2326,1887.18 ccw(c2356.18,1887.18) v1@2334.84,1865.84
  Top Layer w30: UL.6@1506,1938.87 1509,1941.87 1509,2113 v1@1506,2116 ; v1@1496.93,2094.93 cw(c1467.79,2065.79) 1509,2065.79 ; v1@1496.93,2094.93 cw(c1467.79,2065.79) 1509,2065.79 ; v1@1496.93,2094.93 cw(c1467.79,2065.79) 1509,2065.79 ; v1@1496.93,2094.93 cw(c1467.79,2065.79) 1509,2065.79
  Bottom Layer w20: 1401,1693 2281.62,1692.62 2332.14,1743.14 2332.14,1842 2326,1848.14 v1(2326,1857) ; v1(1504,2102) 1504,2111 v1@1509,2116 ; v1(2855.13,2053.87) 2937,1972 3668.07,1972 3892,1748.07 v1(3892,1695) ; v1@2315.39,1846.39 cw(c2274.96,1805.96) 2332.14,1805.96 ; v1@2315.39,1846.39 cw(c2274.96,1805.96) 2332.14,1805.96 ; v1@2315.39,1846.39 cw(c2274.96,1805.96) 2332.14,1805.96 ; v1@2315.39,1846.39 cw(c2274.96,1805.96) 2332.14,1805.96 ; v1@2855.13,2038.87 cw(c2855.13,2002.66) 2880.73,2028.27 ; v1@2855.13,2038.87 cw(c2855.13,2002.66) 2880.73,2028.27 ; v1@2855.13,2038.87 cw(c2855.13,2002.66) 2880.73,2028.27 ; v1@2855.13,2038.87 cw(c2855.13,2002.66) 2880.73,2028.27 ; v1@2870.13,2053.87 ccw(c2906.34,2053.87) 2880.73,2028.27 ; v1@2870.13,2053.87 ccw(c2906.34,2053.87) 2880.73,2028.27 ; v1@2870.13,2053.87 ccw(c2906.34,2053.87) 2880.73,2028.27 ; v1@2870.13,2053.87 ccw(c2906.34,2053.87) 2880.73,2028.27 ; v1@3881.39,1705.61 ccw(c3855.79,1731.21) 3892,1731.21 ; v1@3881.39,1705.61 ccw(c3855.79,1731.21) 3892,1731.21 ; v1@3881.39,1705.61 ccw(c3855.79,1731.21) 3892,1731.21 ; v1@3881.39,1705.61 ccw(c3855.79,1731.21) 3892,1731.21 ; 3892,1731.21 ccw(c3928.21,1731.21) v1@3902.61,1705.61 ; 3892,1731.21 ccw(c3928.21,1731.21) v1@3902.61,1705.61 ; 3892,1731.21 ccw(c3928.21,1731.21) v1@3902.61,1705.61 ; 3892,1731.21 ccw(c3928.21,1731.21) v1@3902.61,1705.61
  Bottom Layer w30: 1401,1693 1246,1848 1246,2175 1342,2271 1455,2271 1504,2222 v1@1504,2111
CON_6: MCU1.1 UL.7 UM.7 UN.7 UY.7 | length 9993.5
  Top Layer w20: UM.7@2377.14,1937.72 UM.7@2376,1938.87 2376,2033 2383.48,2040.48 2638.37,2040.48 2690,1988.85 ; 2733.52,1897.48 2690,1941 2690,1988.85 ; UY.7@4662,1938.87 4662,2081 v1@4671.28,2090.28 ; v1(4668.43,2085.28) 4668.43,2087.43 v1@4671.28,2090.28 ; v1@4684,2103 v1@4671.28,2090.28 ; 2690,1968.43 ccw(c2715.43,1968.43) v1@2714.89,1943 ; 2690,1968.43 ccw(c2715.43,1968.43) v1@2714.89,1943 ; 2690,1968.43 ccw(c2715.43,1968.43) v1@2714.89,1943 ; 2690,1968.43 ccw(c2715.43,1968.43) v1@2714.89,1943 ; 2690,1988.85 ccw(c2715.86,1988.85) v1@2715.32,1963 ; 2690,1988.85 ccw(c2715.86,1988.85) v1@2715.32,1963 ; 2690,1988.85 ccw(c2715.86,1988.85) v1@2715.32,1963 ; 2690,1988.85 ccw(c2715.86,1988.85) v1@2715.32,1963 ; 4662,2033.55 cw(c4720.16,2033.55) v1@4679.03,2074.67 ; 4662,2033.55 cw(c4720.16,2033.55) v1@4679.03,2074.67 ; 4662,2033.55 cw(c4720.16,2033.55) v1@4679.03,2074.67 ; 4662,2033.55 cw(c4720.16,2033.55) v1@4679.03,2074.67
  Top Layer w21: 2733.52,1897.48 MCU1.1@2817.56,1897.48
  Top Layer w24: UN.7@3942,1938.87 3942,1356 4001,1297 4827,1297 4865,1335 4865,2090.69 4852.69,2103 v1@4684,2103 ; v1@4677.62,2076.09 cw(c4742.59,2011.12) 4742.59,2103 ; v1@4677.62,2076.09 cw(c4742.59,2011.12) 4742.59,2103 ; v1@4677.62,2076.09 cw(c4742.59,2011.12) 4742.59,2103 ; v1@4677.62,2076.09 cw(c4742.59,2011.12) 4742.59,2103
  Top Layer w30: UL.7@1558,1940.87 v1@1558,2028 ; v1(2377.14,1773) UM.7@2377.14,1937.72 ; 1558,2003.44 cw(c1585.56,2003.44) v1@1566.07,2022.93 ; 1558,2003.44 cw(c1585.56,2003.44) v1@1566.07,2022.93 ; 1558,2003.44 cw(c1585.56,2003.44) v1@1566.07,2022.93 ; 1558,2003.44 cw(c1585.56,2003.44) v1@1566.07,2022.93
  Bottom Layer w20: 1387.62,1575.38 2138.69,1575.38 2225.93,1662.62 2294.05,1662.62 2362.14,1730.72 2362.14,1758 v1(2377.14,1773) ; v1@2712,1945 v1(2715,1948) ; v1(4668.43,2085.28) v1@4668.43,2087.43 ; 2362.14,1728.14 cw(c2395.69,1728.14) v1@2382.87,1759.14 ; 2362.14,1728.14 cw(c2395.69,1728.14) v1@2382.87,1759.14 ; 2362.14,1728.14 cw(c2395.69,1728.14) v1@2382.87,1759.14 ; 2362.14,1728.14 cw(c2395.69,1728.14) v1@2382.87,1759.14
  Bottom Layer w30: 1387.62,1575.38 1196,1767 1196,2196 1311,2311 1519.43,2311 1556.71,2273.71 1556.71,2030 v1(1559,2030) ; v1@2712,1945 2698,1931 2600,1931 2564,1967 2564,2008 2689.87,2133.87 3962.77,2133.87 4140.64,1956 4537,1956 v1@4671.28,2090.28 ; 1556.71,2059.66 ccw(c1588.66,2059.66) v1@1566.07,2037.07 ; 1556.71,2059.66 ccw(c1588.66,2059.66) v1@1566.07,2037.07 ; 1556.71,2059.66 ccw(c1588.66,2059.66) v1@1566.07,2037.07 ; 1556.71,2059.66 ccw(c1588.66,2059.66) v1@1566.07,2037.07 ; 2649.82,1931 ccw(c2649.82,2013.18) v1@2707.93,1955.07 ; 2649.82,1931 ccw(c2649.82,2013.18) v1@2707.93,1955.07 ; 2649.82,1931 ccw(c2649.82,2013.18) v1@2707.93,1955.07 ; 2649.82,1931 ccw(c2649.82,2013.18) v1@2707.93,1955.07 ; 4647.69,2066.69 cw(c4668.43,2045.95) v1@4668.43,2075.28 ; 4647.69,2066.69 cw(c4668.43,2045.95) v1@4668.43,2075.28 ; 4647.69,2066.69 cw(c4668.43,2045.95) v1@4668.43,2075.28 ; 4647.69,2066.69 cw(c4668.43,2045.95) v1@4668.43,2075.28
CON_7: MCU1.2 UL.8 UM.8 UN.8 UY.8 | length 7677.9
  Top Layer w20: 2429.43,2002.43 2437.48,2010.48 2625.95,2010.48 2651,1985.43 2651,1929.43 2714.44,1865.98 ; UN.8@3992,1938.87 v1(3992,2016) ; v1(4711,2043) 4711,2036 4712,2031 UY.8@4712,1942.87 ; 2539.34,2010.48 cw(c2539.34,1904.34) v1@2614.39,1979.39 ; 2539.34,2010.48 cw(c2539.34,1904.34) v1@2614.39,1979.39 ; 2539.34,2010.48 cw(c2539.34,1904.34) v1@2614.39,1979.39 ; 2539.34,2010.48 cw(c2539.34,1904.34) v1@2614.39,1979.39 ; 2587.63,2010.48 cw(c2587.63,1952.63) v1@2628.54,1993.54 ; 2587.63,2010.48 cw(c2587.63,1952.63) v1@2628.54,1993.54 ; 2587.63,2010.48 cw(c2587.63,1952.63) v1@2628.54,1993.54 ; 2587.63,2010.48 cw(c2587.63,1952.63) v1@2628.54,1993.54 ; v1@3981.39,2005.39 cw(c3955.79,1979.79) UN.8@3992,1979.79 ; v1@3981.39,2005.39 cw(c3955.79,1979.79) UN.8@3992,1979.79 ; v1@3981.39,2005.39 cw(c3955.79,1979.79) UN.8@3992,1979.79 ; v1@3981.39,2005.39 cw(c3955.79,1979.79) UN.8@3992,1979.79 ; UN.8@3992,1979.79 cw(c4028.21,1979.79) v1@4002.61,2005.39 ; UN.8@3992,1979.79 cw(c4028.21,1979.79) v1@4002.61,2005.39 ; UN.8@3992,1979.79 cw(c4028.21,1979.79) v1@4002.61,2005.39 ; UN.8@3992,1979.79 cw(c4028.21,1979.79) v1@4002.61,2005.39 ; v1@4700.39,2032.39 cw(c4672.37,2004.37) 4712,2004.37 ; v1@4700.39,2032.39 cw(c4672.37,2004.37) 4712,2004.37 ; v1@4700.39,2032.39 cw(c4672.37,2004.37) 4712,2004.37 ; v1@4700.39,2032.39 cw(c4672.37,2004.37) 4712,2004.37 ; 4712,2009.2 cw(c4744.8,2009.2) v1@4721.61,2032.39 ; 4712,2009.2 cw(c4744.8,2009.2) v1@4721.61,2032.39 ; 4712,2009.2 cw(c4744.8,2009.2) v1@4721.61,2032.39 ; 4712,2009.2 cw(c4744.8,2009.2) v1@4721.61,2032.39
  Top Layer w21: 2714.44,1865.98 MCU1.2@2817.56,1865.98
  Top Layer w30: UL.8@1610,1942.87 v1@1610,2062 ; v1(2204,1536) 2252,1536 2429.43,1713.43 2429.43,2002.43 ; v1@1600.93,2062.93 cw(c1579.03,2041.03) 1610,2041.03 ; v1@1600.93,2062.93 cw(c1579.03,2041.03) 1610,2041.03 ; v1@1600.93,2062.93 cw(c1579.03,2041.03) 1610,2041.03 ; v1@1600.93,2062.93 cw(c1579.03,2041.03) 1610,2041.03
  Bottom Layer w20: 1616.66,1524 1670.19,1470.47 1745.81,1470.47 1818.34,1543 2189.57,1543 v1@2190.57,1544 ; v1(2625,1990) 2733.87,2098.87 2900.13,2098.87 2987,2012 ; 3963,2012 v1(3992,2016) ; 2150.89,1543 cw(c2150.89,1482.89) v1@2193.39,1525.39 ; 2150.89,1543 cw(c2150.89,1482.89) v1@2193.39,1525.39 ; 2150.89,1543 cw(c2150.89,1482.89) v1@2193.39,1525.39 ; 2150.89,1543 cw(c2150.89,1482.89) v1@2193.39,1525.39 ; v1@2625,2005 ccw(c2625,2041.21) 2650.61,2015.61 ; v1@2625,2005 ccw(c2625,2041.21) 2650.61,2015.61 ; v1@2625,2005 ccw(c2625,2041.21) 2650.61,2015.61 ; v1@2625,2005 ccw(c2625,2041.21) 2650.61,2015.61 ; v1@2640,1990 cw(c2676.21,1990) 2650.61,2015.61 ; v1@2640,1990 cw(c2676.21,1990) 2650.61,2015.61 ; v1@2640,1990 cw(c2676.21,1990) 2650.61,2015.61 ; v1@2640,1990 cw(c2676.21,1990) 2650.61,2015.61
  Bottom Layer w30: v1(1608,2070) 1608,2317 1566,2359 1276,2359 1156,2239 1156,1733 1365,1524 1616.66,1524 ; 2987,2012 3963,2012 ; v1(3992,2016) 4124,1909 4577,1909 v1(4711,2043) ; 3958.2,2012 ccw(c3958.2,2049.8) v1@3984.93,2023.07 ; 3958.2,2012 ccw(c3958.2,2049.8) v1@3984.93,2023.07 ; 3958.2,2012 ccw(c3958.2,2049.8) v1@3984.93,2023.07 ; 3958.2,2012 ccw(c3958.2,2049.8) v1@3984.93,2023.07
CON_8: MCU1.3 UL.9 UM.9 UN.9 UY.9 | length 6803.5
  Top Layer w20: 2476,1824 2484,1824 v1(2502,1806) ; v1@2498,1802 v1@2504,1796 ; 2666,1812 2688.49,1834.49 ; UY.9@4763,1947.87 v1@4763,2034 ; 4763,1987.47 cw(c4826.53,1987.47) v1@4781.61,2032.39 ; 4763,1987.47 cw(c4826.53,1987.47) v1@4781.61,2032.39 ; 4763,1987.47 cw(c4826.53,1987.47) v1@4781.61,2032.39 ; 4763,1987.47 cw(c4826.53,1987.47) v1@4781.61,2032.39
  Top Layer w21: 2688.49,1834.49 MCU1.3@2817.56,1834.49
  Top Layer w24: v1(4046,2129) 4046,1944 UN.9@4047,1943 ; v1@4036.81,2119.81 cw(c4014.62,2097.62) 4046,2097.62 ; v1@4036.81,2119.81 cw(c4014.62,2097.62) 4046,2097.62 ; v1@4036.81,2119.81 cw(c4014.62,2097.62) 4046,2097.62 ; v1@4036.81,2119.81 cw(c4014.62,2097.62) 4046,2097.62 ; 4046,2097.62 cw(c4077.38,2097.62) v1@4055.19,2119.81 ; 4046,2097.62 cw(c4077.38,2097.62) v1@4055.19,2119.81 ; 4046,2097.62 cw(c4077.38,2097.62) v1@4055.19,2119.81 ; 4046,2097.62 cw(c4077.38,2097.62) v1@4055.19,2119.81
  Top Layer w30: UL.9@1656,1938.87 1656,2011 1704,2059 v1(1739,2059) ; 2476,1824 UM.9@2476,1938.87 ; v1@2504,1796 2520,1812 2666,1812 ; 1662.18,2017.18 cw(c1739,1940.36) v1@1739,2049 ; 1662.18,2017.18 cw(c1739,1940.36) v1@1739,2049 ; 1662.18,2017.18 cw(c1739,1940.36) v1@1739,2049 ; 1662.18,2017.18 cw(c1739,1940.36) v1@1739,2049 ; 1686.5,2041.5 cw(c1716.64,2011.36) v1@1734.75,2049.95 ; 1686.5,2041.5 cw(c1716.64,2011.36) v1@1734.75,2049.95 ; 1686.5,2041.5 cw(c1716.64,2011.36) v1@1734.75,2049.95 ; 1686.5,2041.5 cw(c1716.64,2011.36) v1@1734.75,2049.95 ; 1713.39,2068.39 cw(c1739,2042.79) v1@1739,2079 ; 1713.39,2068.39 cw(c1739,2042.79) v1@1739,2079 ; 1713.39,2068.39 cw(c1739,2042.79) v1@1739,2079 ; 1713.39,2068.39 cw(c1739,2042.79) v1@1739,2079 ; 2476,1820.49 ccw(c2516.49,1820.49) v1@2487.86,1791.86 ; 2476,1820.49 ccw(c2516.49,1820.49) v1@2487.86,1791.86 ; 2476,1820.49 ccw(c2516.49,1820.49) v1@2487.86,1791.86 ; 2476,1820.49 ccw(c2516.49,1820.49) v1@2487.86,1791.86 ; 2476,1892.91 ccw(c2588.91,1892.91) v1@2509.07,1813.07 ; 2476,1892.91 ccw(c2588.91,1892.91) v1@2509.07,1813.07 ; 2476,1892.91 ccw(c2588.91,1892.91) v1@2509.07,1813.07 ; 2476,1892.91 ccw(c2588.91,1892.91) v1@2509.07,1813.07 ; v1@2509.07,1798.93 cw(c2540.63,1767.37) 2540.63,1812 ; v1@2509.07,1798.93 cw(c2540.63,1767.37) 2540.63,1812 ; v1@2509.07,1798.93 cw(c2540.63,1767.37) 2540.63,1812 ; v1@2509.07,1798.93 cw(c2540.63,1767.37) 2540.63,1812
  Bottom Layer w30: v1@1741,2061 1776,2026 2282,2026 v1(2502,1806) 2502,2027 2711,2236 3983.46,2236 v1@4052.28,2135.28 ; v1@4062,2145 4680.2,2145 4756,2069.2 ; v1@1739,2049 cw(c1739,2015.2) 1762.9,2039.1 ; v1@1739,2049 cw(c1739,2015.2) 1762.9,2039.1 ; v1@1739,2049 cw(c1739,2015.2) 1762.9,2039.1 ; v1@1739,2049 cw(c1739,2015.2) 1762.9,2039.1 ; 4027.7,2171.25 cw(c3983.16,2140.82) v1@4036.17,2130.85 ; 4027.7,2171.25 cw(c3983.16,2140.82) v1@4036.17,2130.85 ; 4027.7,2171.25 cw(c3983.16,2140.82) v1@4036.17,2130.85 ; 4027.7,2171.25 cw(c3983.16,2140.82) v1@4036.17,2130.85 ; v1@4053.07,2121.93 cw(c4108.77,2066.23) 4108.77,2145 ; v1@4053.07,2121.93 cw(c4108.77,2066.23) 4108.77,2145 ; v1@4053.07,2121.93 cw(c4108.77,2066.23) 4108.77,2145 ; v1@4053.07,2121.93 cw(c4108.77,2066.23) 4108.77,2145 ; 4746.01,2079.19 cw(c4709.82,2043) v1@4761,2043 ; 4746.01,2079.19 cw(c4709.82,2043) v1@4761,2043 ; 4746.01,2079.19 cw(c4709.82,2043) v1@4761,2043 ; 4746.01,2079.19 cw(c4709.82,2043) v1@4761,2043
  other v1: 4771,2043
GND: BAT2.K cap2.A cap3.A HOARE1.2 MCU1.16 P_GND.1 P_GND.2 RAX1.2 RES_RST1.A UL.1 UL.10 UM.1 UM.10 UN.1 UN.10 UY.1 UY.10 | length 14756.8
  Top Layer w20: UM.1@2076,1895 UM.1@2076,1938.87 ; v1(2973,1609) 2973,1602.93 3008.5,1567.43 MCU1.16@3008.5,1517.56 3008.5,1459.5 ; RES_RST1.A@3402.6,1640 3521.6,1521 3610,1521 v1@3676,1455 ; 3407,1325 3457.4,1274.6 ; cap2.A@3459.4,1222 3596,1222 3680,1306 3680,1422 ; UN.1@3642,1938.87 3642,1687.92 3679.85,1650.07 3679.85,1430.85 ; RES_RST1.A@3402.6,1626.38 cw(c3402.6,1593.49) 3425.85,1616.75 ; RES_RST1.A@3402.6,1626.38 cw(c3402.6,1593.49) 3425.85,1616.75 ; RES_RST1.A@3402.6,1626.38 cw(c3402.6,1593.49) 3425.85,1616.75 ; RES_RST1.A@3402.6,1626.38 cw(c3402.6,1593.49) 3425.85,1616.75 ; RES_RST1.A@3415.04,1638.82 ccw(c3442.22,1638.82) RES_RST1.A@3423,1619.6 ; RES_RST1.A@3415.04,1638.82 ccw(c3442.22,1638.82) RES_RST1.A@3423,1619.6 ; RES_RST1.A@3415.04,1638.82 ccw(c3442.22,1638.82) RES_RST1.A@3423,1619.6 ; RES_RST1.A@3415.04,1638.82 ccw(c3442.22,1638.82) RES_RST1.A@3423,1619.6 ; cap2.A@3448.6,1229.98 ccw(c3427.37,1251.22) 3457.4,1251.22 ; cap2.A@3448.6,1229.98 ccw(c3427.37,1251.22) 3457.4,1251.22 ; cap2.A@3448.6,1229.98 ccw(c3427.37,1251.22) 3457.4,1251.22 ; cap2.A@3448.6,1229.98 ccw(c3427.37,1251.22) 3457.4,1251.22 ; 3457.4,1251.22 ccw(c3487.44,1251.22) cap2.A@3466.2,1229.98 ; 3457.4,1251.22 ccw(c3487.44,1251.22) cap2.A@3466.2,1229.98 ; 3457.4,1251.22 ccw(c3487.44,1251.22) cap2.A@3466.2,1229.98 ; 3457.4,1251.22 ccw(c3487.44,1251.22) cap2.A@3466.2,1229.98 ; cap2.A@3466.2,1212.38 cw(c3489.41,1189.17) 3489.41,1222 ; cap2.A@3466.2,1212.38 cw(c3489.41,1189.17) 3489.41,1222 ; cap2.A@3466.2,1212.38 cw(c3489.41,1189.17) 3489.41,1222 ; cap2.A@3466.2,1212.38 cw(c3489.41,1189.17) 3489.41,1222 ; cap2.A@3466.2,1229.98 ccw(c3485.46,1249.24) 3485.46,1222 ; cap2.A@3466.2,1229.98 ccw(c3485.46,1249.24) 3485.46,1222 ; cap2.A@3466.2,1229.98 ccw(c3485.46,1249.24) 3485.46,1222 ; cap2.A@3466.2,1229.98 ccw(c3485.46,1249.24) 3485.46,1222
  Top Layer w22: 3008.5,1459.5 3143,1325 3407,1325
  Top Layer w30: 1254.5,1620.5 1207,1573 1207,1444 1231,1420 RAX1.2@1280,1420 HOARE1.2@1708,1420 ; UL.1@1256,1938.87 1256,1619 1575,1619 1706,1750 UL.10@1706,1938.87 ; 1706,1862 1709,1865 2046,1865 UM.1@2076,1895 ; UM.10@2526,1938.87 2526,1913 2573,1866 v1(2591,1866) ; cap3.A@2565.27,1164.71 2565.27,1145.73 2590.01,1120.99 3428.99,1120.99 3457.4,1149.4 3457.4,1274.6 ; v1(2888,1724) 2888,1694 v1(2973,1609) ; UN.10@4092,1938.87 4092,1816 4362,1546 ; UY.1@4362,1938.87 4362,1546 ; P_GND.2@4800,1720 4809,1720 P_GND.1@4809,1629 ; P_GND.1@4812,1629 4812,1549 4724,1461 4447,1461 4362,1546 ; P_GND.2@4812,1720 UY.10@4812,1938.87 ; 1244.93,1420 cw(c1244.93,1384.93) RAX1.2@1269.73,1409.73 ; 1244.93,1420 ccw(c1244.93,1455.07) RAX1.2@1269.73,1430.27 ; 1244.93,1420 cw(c1244.93,1384.93) RAX1.2@1269.73,1409.73 ; 1244.93,1420 ccw(c1244.93,1455.07) RAX1.2@1269.73,1430.27 ; 1244.93,1420 cw(c1244.93,1384.93) RAX1.2@1269.73,1409.73 ; 1244.93,1420 ccw(c1244.93,1455.07) RAX1.2@1269.73,1430.27 ; 1244.93,1420 cw(c1244.93,1384.93) RAX1.2@1269.73,1409.73 ; 1244.93,1420 ccw(c1244.93,1455.07) RAX1.2@1269.73,1430.27 ; RAX1.2@1290.27,1409.73 cw(c1315.07,1384.93) 1315.07,1420 ; RAX1.2@1290.27,1409.73 cw(c1315.07,1384.93) 1315.07,1420 ; RAX1.2@1290.27,1409.73 cw(c1315.07,1384.93) 1315.07,1420 ; RAX1.2@1290.27,1409.73 cw(c1315.07,1384.93) 1315.07,1420 ; RAX1.2@1290.27,1430.27 ccw(c1315.07,1455.07) 1315.07,1420 ; RAX1.2@1290.27,1430.27 ccw(c1315.07,1455.07) 1315.07,1420 ; RAX1.2@1290.27,1430.27 ccw(c1315.07,1455.07) 1315.07,1420 ; RAX1.2@1290.27,1430.27 ccw(c1315.07,1455.07) 1315.07,1420 ; 1672.93,1420 cw(c1672.93,1384.93) HOARE1.2@1697.73,1409.73 ; 1672.93,1420 ccw(c1672.93,1455.07) HOARE1.2@1697.73,1430.27 ; 1672.93,1420 cw(c1672.93,1384.93) HOARE1.2@1697.73,1409.73 ; 1672.93,1420 ccw(c1672.93,1455.07) HOARE1.2@1697.73,1430.27 ; 1672.93,1420 cw(c1672.93,1384.93) HOARE1.2@1697.73,1409.73 ; 1672.93,1420 ccw(c1672.93,1455.07) HOARE1.2@1697.73,1430.27 ; 1672.93,1420 cw(c1672.93,1384.93) HOARE1.2@1697.73,1409.73 ; 1672.93,1420 ccw(c1672.93,1455.07) HOARE1.2@1697.73,1430.27 ; 2074.09,1893.09 ccw(c2061.78,1905.4) UM.1@2079.19,1905.4 ; 2074.09,1893.09 ccw(c2061.78,1905.4) UM.1@2079.19,1905.4 ; 2074.09,1893.09 ccw(c2061.78,1905.4) UM.1@2079.19,1905.4 ; 2074.09,1893.09 ccw(c2061.78,1905.4) UM.1@2079.19,1905.4 ; 2543.2,1895.8 ccw(c2591,1943.6) v1@2591,1876 ; 2543.2,1895.8 ccw(c2591,1943.6) v1@2591,1876 ; 2543.2,1895.8 ccw(c2591,1943.6) v1@2591,1876 ; 2543.2,1895.8 ccw(c2591,1943.6) v1@2591,1876 ; cap3.A@2557.34,1173.56 cw(c2538.17,1154.39) 2565.27,1154.39 ; cap3.A@2557.34,1173.56 cw(c2538.17,1154.39) 2565.27,1154.39 ; cap3.A@2557.34,1173.56 cw(c2538.17,1154.39) 2565.27,1154.39 ; cap3.A@2557.34,1173.56 cw(c2538.17,1154.39) 2565.27,1154.39 ; cap3.A@2569.14,1175.27 ccw(c2598.12,1159.53) 2574.8,1136.2 ; cap3.A@2569.14,1175.27 ccw(c2598.12,1159.53) 2574.8,1136.2 ; cap3.A@2569.14,1175.27 ccw(c2598.12,1159.53) 2574.8,1136.2 ; cap3.A@2569.14,1175.27 ccw(c2598.12,1159.53) 2574.8,1136.2 ; v1@2898,1724 ccw(c2994.57,1724) 2926.28,1655.72 ; v1@2898,1724 ccw(c2994.57,1724) 2926.28,1655.72 ; v1@2898,1724 ccw(c2994.57,1724) 2926.28,1655.72 ; v1@2898,1724 ccw(c2994.57,1724) 2926.28,1655.72 ; P_GND.1@4789.73,1609.73 cw(c4735.96,1555.96) 4812,1555.96 ; P_GND.1@4789.73,1609.73 cw(c4735.96,1555.96) 4812,1555.96 ; P_GND.1@4789.73,1609.73 cw(c4735.96,1555.96) 4812,1555.96 ; P_GND.1@4789.73,1609.73 cw(c4735.96,1555.96) 4812,1555.96 ; P_GND.1@4789.73,1630.27 ccw(c4743.2,1676.8) 4809,1676.8 ; P_GND.1@4789.73,1630.27 ccw(c4743.2,1676.8) 4809,1676.8 ; P_GND.1@4789.73,1630.27 ccw(c4743.2,1676.8) 4809,1676.8 ; P_GND.1@4789.73,1630.27 ccw(c4743.2,1676.8) 4809,1676.8 ; P_GND.2@4789.73,1709.73 cw(c4743.2,1663.2) 4809,1663.2 ; P_GND.2@4789.73,1709.73 cw(c4743.2,1663.2) 4809,1663.2 ; P_GND.2@4789.73,1709.73 cw(c4743.2,1663.2) 4809,1663.2 ; P_GND.2@4789.73,1709.73 cw(c4743.2,1663.2) 4809,1663.2 ; P_GND.2@4789.73,1730.27 ccw(c4735.96,1784.04) 4812,1784.04 ; P_GND.2@4789.73,1730.27 ccw(c4735.96,1784.04) 4812,1784.04 ; P_GND.2@4789.73,1730.27 ccw(c4735.96,1784.04) 4812,1784.04 ; P_GND.2@4789.73,1730.27 ccw(c4735.96,1784.04) 4812,1784.04
  Bottom Layer w30: HOARE1.2@1708,1420 2386.43,1420 2534.43,1272 3377.57,1272 3569.57,1464 4226.24,1464 4536.77,1774.53 4702.59,1774.53 4757.11,1720 ; v1(2591,1866) 2729,1866 2862,1733 ; HOARE1.2@1718.27,1409.73 cw(c1743.07,1384.93) 1743.07,1420 ; HOARE1.2@1718.27,1409.73 cw(c1743.07,1384.93) 1743.07,1420 ; HOARE1.2@1718.27,1409.73 cw(c1743.07,1384.93) 1743.07,1420 ; HOARE1.2@1718.27,1409.73 cw(c1743.07,1384.93) 1743.07,1420 ; HOARE1.2@1718.27,1430.27 ccw(c1743.07,1455.07) 1743.07,1420 ; HOARE1.2@1718.27,1430.27 ccw(c1743.07,1455.07) 1743.07,1420 ; HOARE1.2@1718.27,1430.27 ccw(c1743.07,1455.07) 1743.07,1420 ; HOARE1.2@1718.27,1430.27 ccw(c1743.07,1455.07) 1743.07,1420 ; 2841.91,1753.09 ccw(c2888,1799.18) v1@2888,1734 ; 2841.91,1753.09 ccw(c2888,1799.18) v1@2888,1734 ; 2841.91,1753.09 ccw(c2888,1799.18) v1@2888,1734 ; 2841.91,1753.09 ccw(c2888,1799.18) v1@2888,1734 ; 4724.03,1753.08 ccw(c4776.49,1805.54) P_GND.2@4796.15,1734.01 ; 4724.03,1753.08 ccw(c4776.49,1805.54) P_GND.2@4796.15,1734.01 ; 4724.03,1753.08 ccw(c4776.49,1805.54) P_GND.2@4796.15,1734.01 ; 4724.03,1753.08 ccw(c4776.49,1805.54) P_GND.2@4796.15,1734.01 ; 4760.5,1716.61 ccw(c4792.21,1748.33) P_GND.2@4804.1,1705.08 ; 4760.5,1716.61 ccw(c4792.21,1748.33) P_GND.2@4804.1,1705.08 ; 4760.5,1716.61 ccw(c4792.21,1748.33) P_GND.2@4804.1,1705.08 ; 4760.5,1716.61 ccw(c4792.21,1748.33) P_GND.2@4804.1,1705.08
  other v1: 3679.85,1464
INTRUPT0: MCU1.8 RAX1.3 | length 1975.5
  Top Layer w20: 2505.87,1430.87 2750.51,1675.51 2816.06,1675.51 MCU1.8@2817.56,1677.01
  Top Layer w30: RAX1.3@1280,1520 1554,1520 1649,1615 1785,1615 1969.13,1430.87 2505.87,1430.87 ; RAX1.3@1290.27,1509.73 cw(c1315.07,1484.93) 1315.07,1520 ; RAX1.3@1290.27,1509.73 cw(c1315.07,1484.93) 1315.07,1520 ; RAX1.3@1290.27,1509.73 cw(c1315.07,1484.93) 1315.07,1520 ; RAX1.3@1290.27,1509.73 cw(c1315.07,1484.93) 1315.07,1520 ; RAX1.3@1290.27,1530.27 ccw(c1315.07,1555.07) 1315.07,1520 ; RAX1.3@1290.27,1530.27 ccw(c1315.07,1555.07) 1315.07,1520 ; RAX1.3@1290.27,1530.27 ccw(c1315.07,1555.07) 1315.07,1520 ; RAX1.3@1290.27,1530.27 ccw(c1315.07,1555.07) 1315.07,1520